# Altium PCB NewTrueTouch.PcbDoc
Units mil, origin at the board's own origin, x right, y up, seen from the top; angles counter-clockwise.
Board outline 3600 x 3500 mil, 2 copper layers (Top Layer, Bottom Layer); 47 components, 37 nets, 184 pads, 3 vias.
Unrouted connection lines stored in the file: 23.
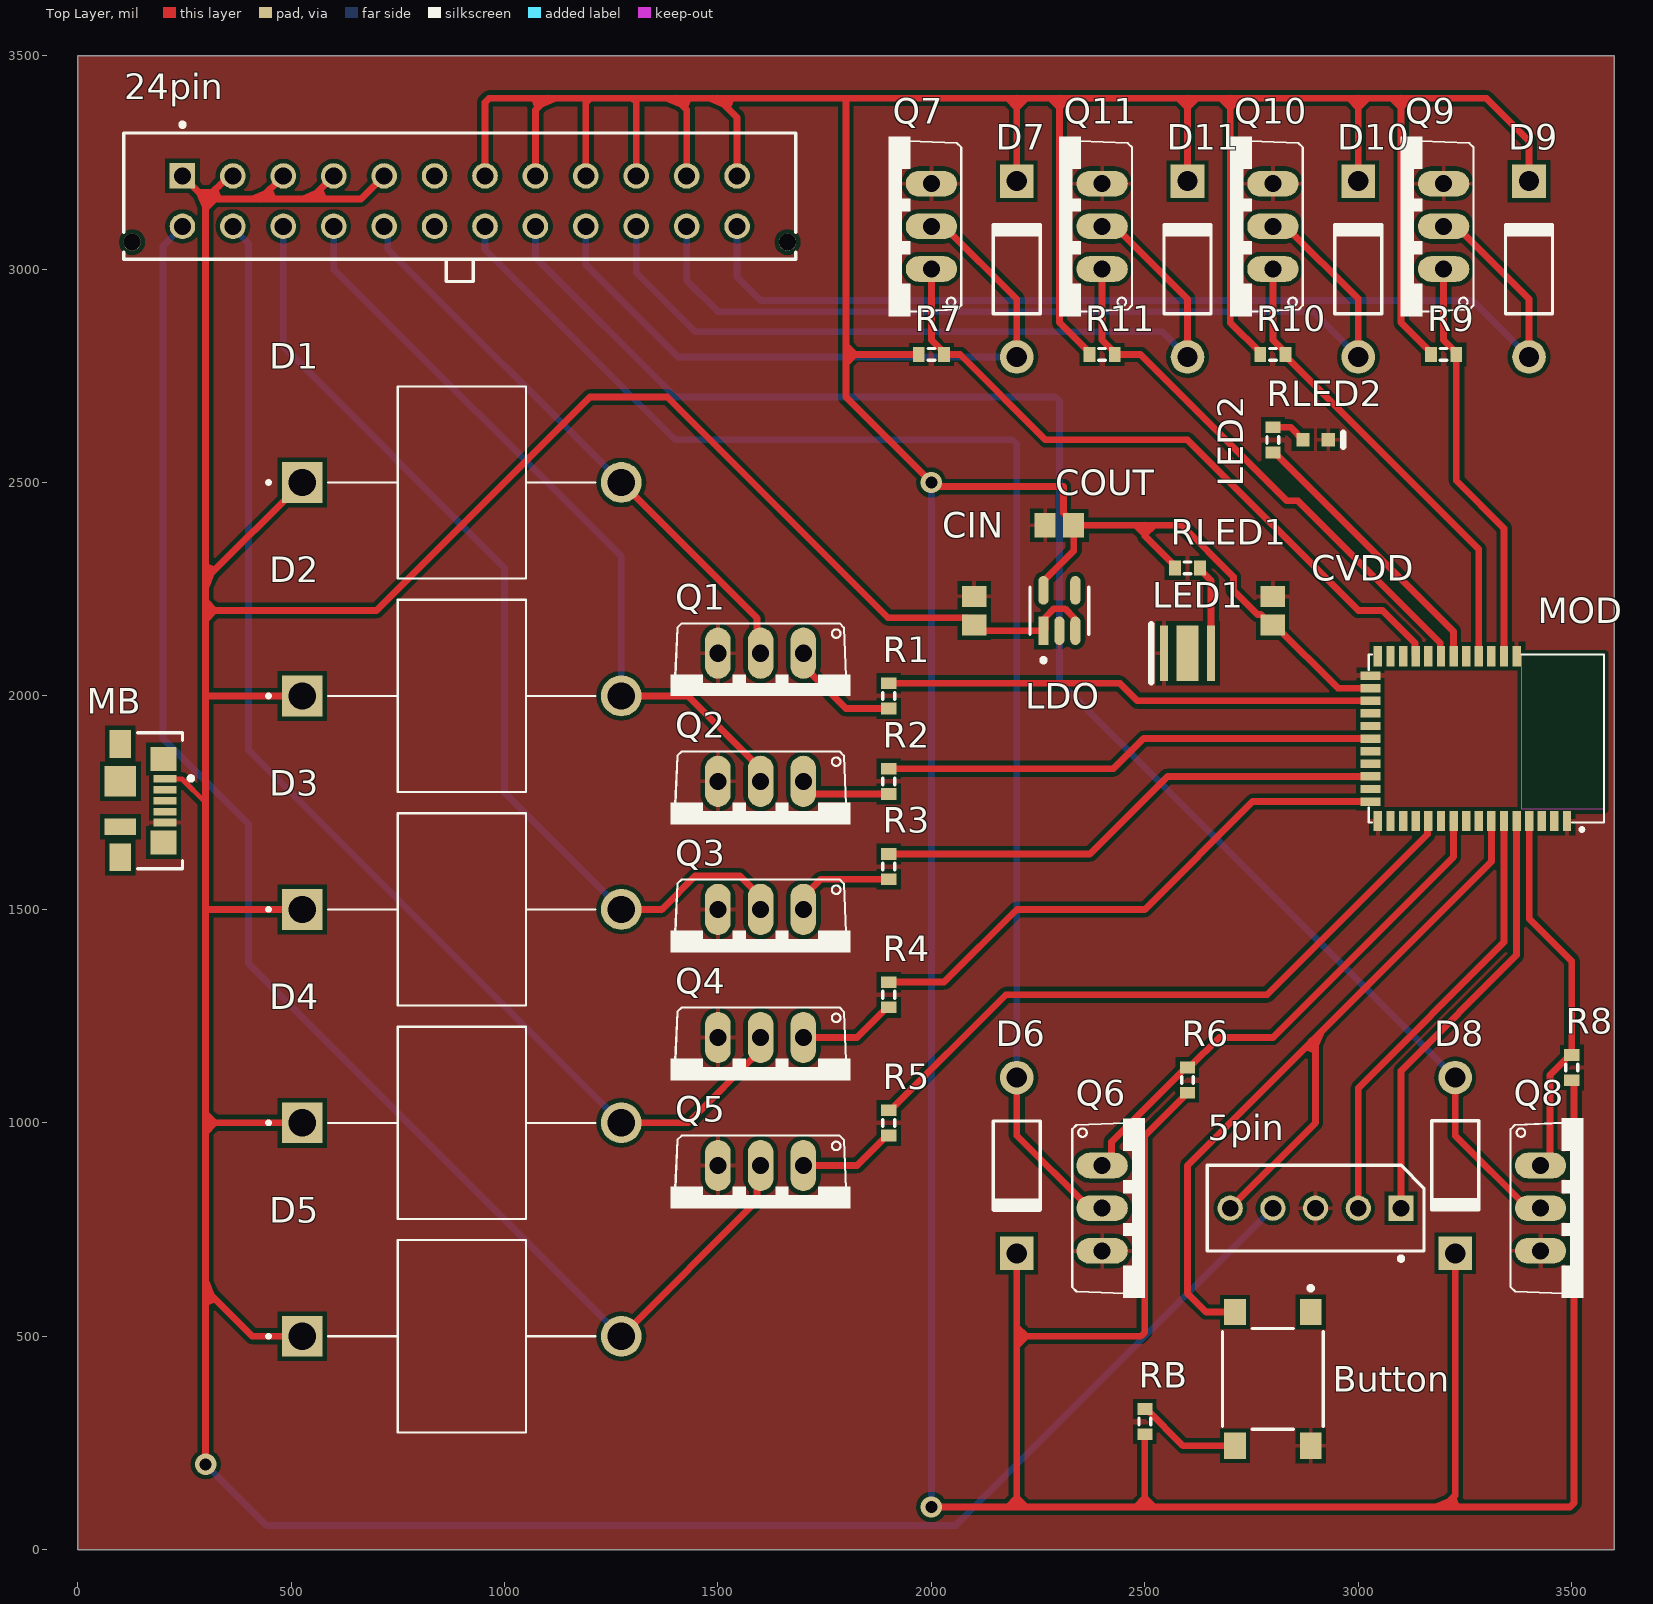
[diagram p0: Top Layer view]
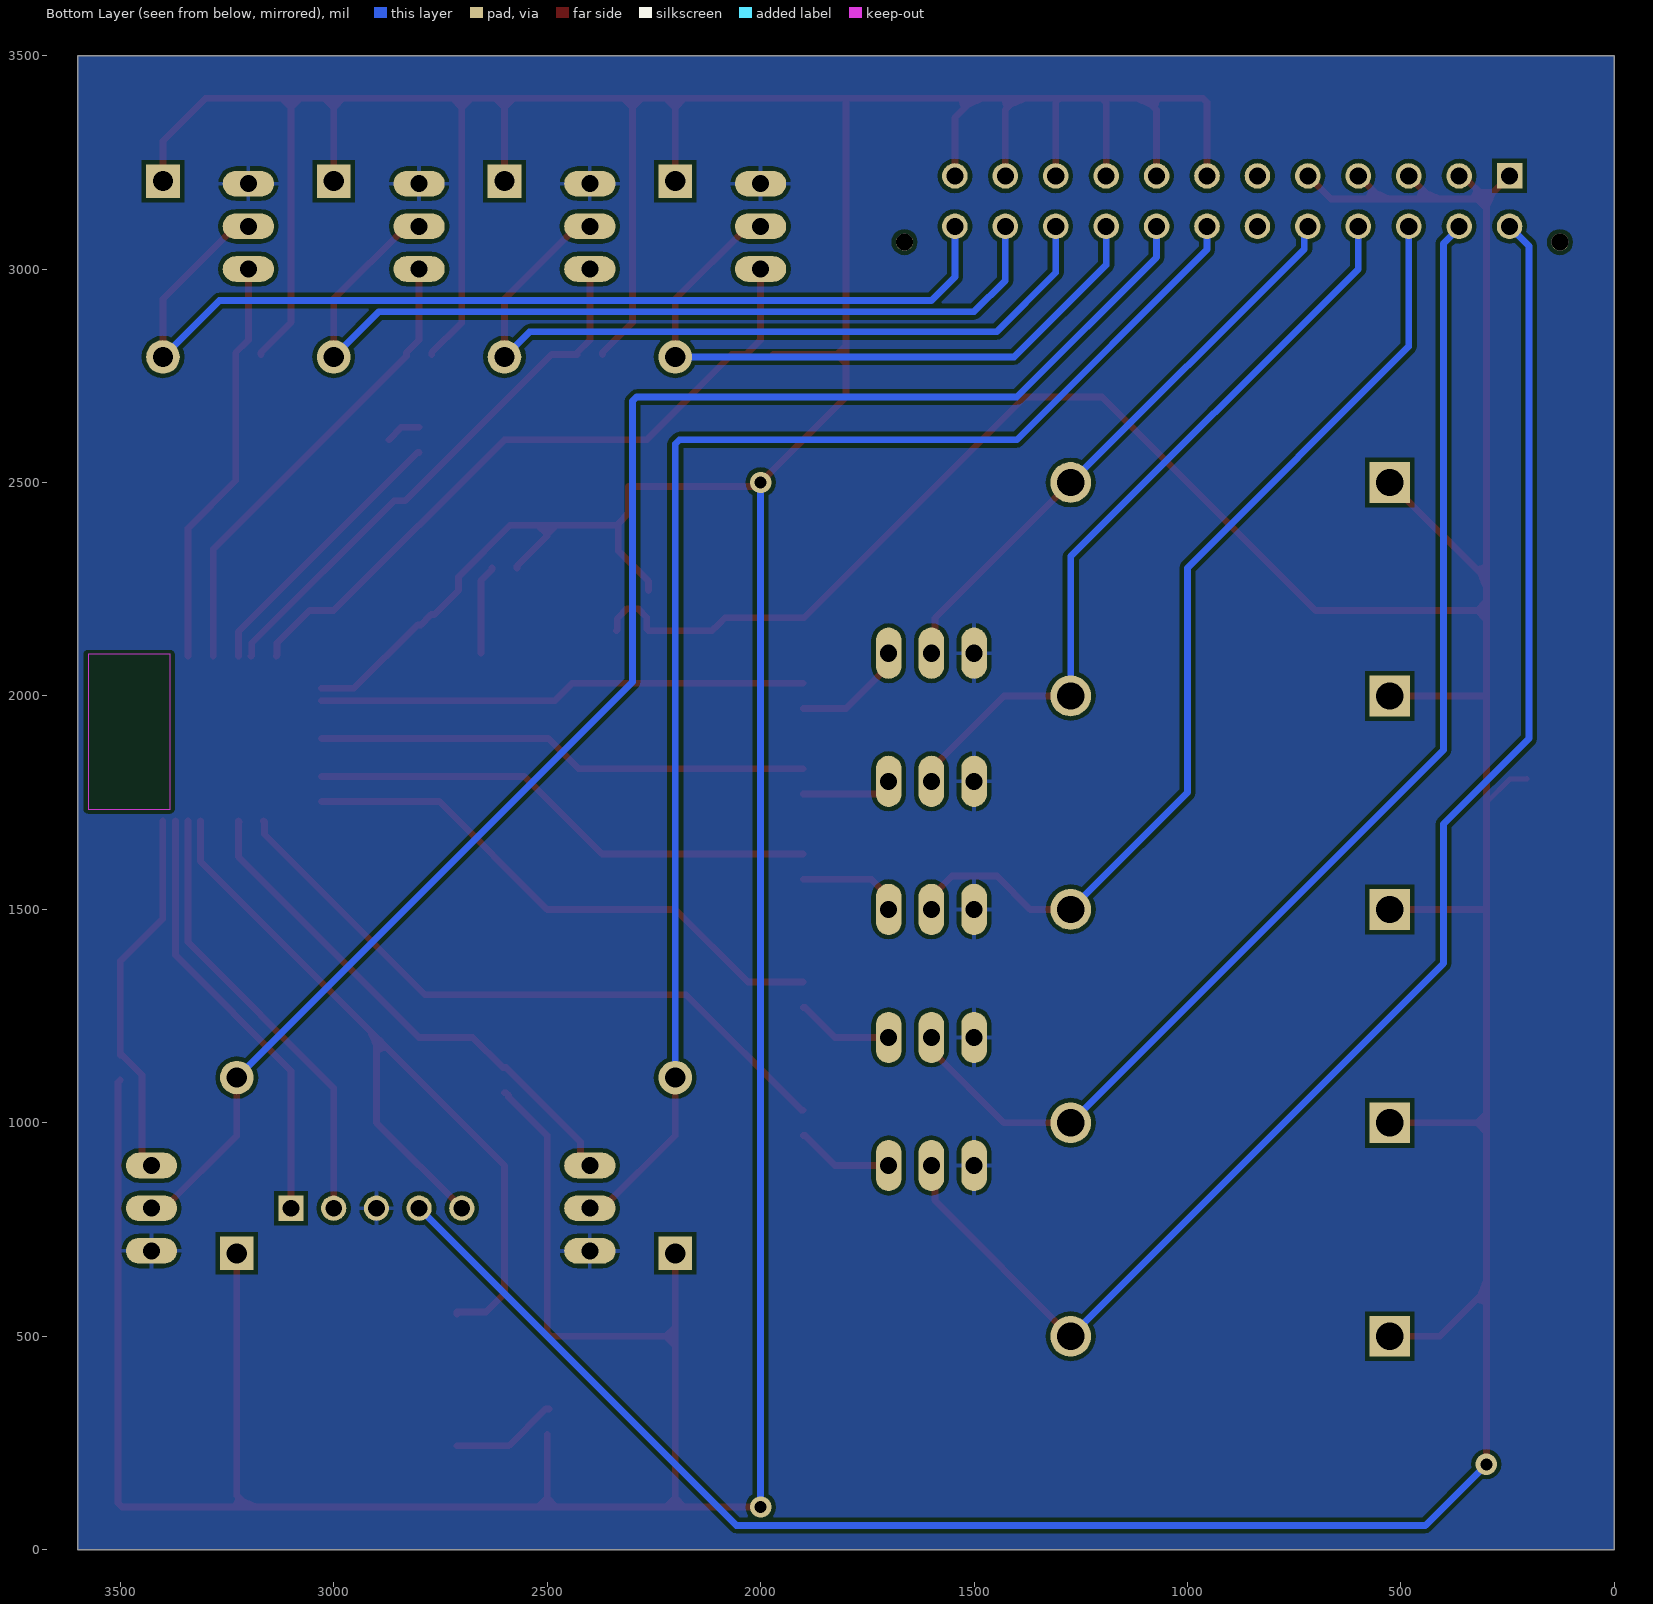
[diagram p1: Bottom Layer view, seen from below]

## Layer stack, top to bottom
Top Solder: solder mask 0.4, Solder Resist, Dk 3.5
Top Layer: signal copper 1.4
Dielectric 1: dielectric 12.6, FR-4, Dk 4.8
Bottom Layer: signal copper 1.4
Bottom Solder: solder mask 0.4, Solder Resist, Dk 3.5

## Board outline
0,0 3600,0 3600,3500 0,3500

## Design rules (kind name [scope] priority, off if disabled: settings)
Clearance [All] p1: gap=10 ignorepadtopadclearanceinfootprint=FALSE except(0: Arc-Hole Track-Hole SMDPad-Hole THPad-Hole Via-Hole Fill-Hole Poly-Hole Region-Hole Text-Hole)
HoleToHoleClearance [All] p1: gap=19.68 allowstackedmicrovias=TRUE
MinimumAnnularRing [All] p1: minimumring=5.12
PolygonConnect [All] p1: connectstyle=Relief reliefconductorwidth=10 reliefentries=4 polygonreliefangle="90 Angle" airgapwidth=10
RoutingVias [All] p1: holewidth=28 width=50 viastyle="Through Hole" minholewidth=28 minwidth=50 maxholewidth=28 maxwidth=50
SolderMaskExpansion [All] p1: expansion=4 istentingtop=FALSE
Width [All] p1: maxlimit=16 minlimit=8 preferedwidth=12 minimp=50.000000 maximp=50.000000 favimp=50.000000
29 further rules are at their usual default settings.

## Components (designator, comment, footprint, x,y, rotation, side; value= is the part's Value field where it differs from the comment)
5pin "66100511622" 66100511622 2900,800 r0 top
24pin "66202421122" 66202421122 895.28,3170.87 r180 top
Button "PTS645SM43SMTR92LFS" FP-PTS645SM43SMTR92LFS-MFG 2800,400 r270 top
CIN "1uF" CAPC2013X140X45NL15T25 2100,2200 r270 top
COUT "1uF" CAPC2013X140X45NL15T25 2300,2400 r0 top
CVDD "1uF" CAPC2013X140X45NL15T25 2800,2200 r270 top
D1 "1N5824" DIOAD1898W129L762D1143 900,2500 r0 top
D2 "1N5824" DIOAD1898W129L762D1143 900,2000 r0 top
D3 "1N5824" DIOAD1898W129L762D1143 900,1500 r0 top
D4 "1N5824" DIOAD1898W129L762D1143 900,1000 r0 top
D5 "1N5824" DIOAD1898W129L762D1143 900,500 r0 top
D6 "Diode 1N4004" DO-41 2200,900 r270 top
D7 "Diode 1N4004" DO-41 2200,3000 r90 top
D8 "Diode 1N4004" DO-41 3226.97,900.11 r270 top
D9 "Diode 1N4004" DO-41 3400,3000 r90 top
D10 "Diode 1N4004" DO-41 3000,3000 r90 top
D11 "Diode 1N4004" DO-41 2600,3000 r90 top
LDO "AP2112K-3.3TRG1" FP-SOT25-IPC_A 2300,2200 r90 top
LED1 "Power LED" CREE-XPEBRD-L1_V 2600,2100 r180 top
LED2 "White LED" LTST-LTW-C191TS5_V 2900,2600 r0 top
MB "473460001" FP-473460001-MFG 113.78,1754.72 r270 top
MOD "BL652-SC-01-T/R" XCVR_BL652-SC-01-T/R 3300,1900 r270 top
Q1 "FQP30N06L" TO220V 1600,2000 r180 top
Q2 "FQP30N06L" TO220V 1600,1700 r180 top
Q3 "FQP30N06L" TO220V 1600,1400 r180 top
Q4 "FQP30N06L" TO220V 1600,1100 r180 top
Q5 "FQP30N06L" TO220V 1600,800 r180 top
Q6 "FQP30N06L" TO220V 2500,800 r270 top
Q7 "FQP30N06L" TO220V 1900,3100 r90 top
Q8 "FQP30N06L" TO220V 3526.97,800.11 r270 top
Q9 "FQP30N06L" TO220V 3100,3100 r90 top
Q10 "FQP30N06L" TO220V 2700,3100 r90 top
Q11 "FQP30N06L" TO220V 2300,3100 r90 top
R1 "Res3" J1-0603 1900,2000 r90 top value=1K
R2 "Res3" J1-0603 1900,1800 r90 top value=1K
R3 "Res3" J1-0603 1900,1600 r90 top value=1K
R4 "Res3" J1-0603 1900,1300 r90 top value=1K
R5 "Res3" J1-0603 1900,1000 r90 top value=1K
R6 "Res3" J1-0603 2600,1100 r270 top value=1K
R7 "Res3" J1-0603 2000,2800 r180 top value=1K
R8 "Res3" J1-0603 3500,1129.53 r270 top value=1K
R9 "Res3" J1-0603 3200,2800 r180 top value=1K
R10 "Res3" J1-0603 2800,2800 r180 top value=1K
R11 "Res3" J1-0603 2400,2800 r180 top value=1K
RB "Res3" J1-0603 2500,300 r270 top value=1K
RLED1 "Res3" J1-0603 2600,2300 r0 top value=4
RLED2 "Res3" J1-0603 2800,2600 r270 top value=8

## Footprints (in the part's own frame and the unit in brackets; to place one, negate y for a bottom-side part, rotate by r counter-clockwise, add the part's x,y. Pads: shape width x height; smd on the part's side, far side on the other; paste and mask are expansions set on the pad)
66100511622 [mm] "2.54 mm Intercom Male Horizontal Shrouded Header, 5p"
  rect 1.5x1.5 hole 1: 1(5.08,0)
  round 1.5 hole 1: 2(2.54,0) 3(0,0) 4(-2.54,0) 5(-5.08,0)
  silkscreen extent -6.45,-3.12 6.45,2.55, body extent -6.2,-2.5 6.2,2.5, height 11.33
66202421122 [mm] "Dual row Vertical header 26p"
  rect 1.52x1.52 hole 1.02: 1(16.5,-1.2)
  round 1.52 hole 1.02: 2(13.5,-1.2) 3(10.5,-1.2) 4(7.5,-1.2) 5(4.5,-1.2) 6(1.5,-1.2) 7(-1.5,-1.2) 8(-4.5,-1.2) 9(-7.5,-1.2) 10(-10.5,-1.2) 11(-13.5,-1.2) 12(-16.5,-1.2) 13(16.5,1.8) 14(13.5,1.8) 15(10.5,1.8) 16(7.5,1.8) 17(4.5,1.8) 18(1.5,1.8) 19(-1.5,1.8) 20(-4.5,1.8) 21(-7.5,1.8) 22(-10.5,1.8) 23(-13.5,1.8) 24(-16.5,1.8)
  round 1.02 hole 1.02 unplated: MH1(-19.5,2.74) MH2(19.5,2.74)
  silkscreen extent -20,-4.37 20,5.08, body extent -19.85,-3.68 19.85,5.08, height 9.93
CAPC2013X140X45NL15T25 [mm] "Chip Capacitor, 2-Leads, Body 2.00x1.25mm, IPC Medium Density"
  rect 1.25x1.45 smd: 1(-0.85,0) 2(0.85,0)
  body extent -1.08,-0.7 1.07,0.7, height 1.4
CREE-XPEBRD-L1_V [mm] "SMD, 3-Leads, Body 3.45x3.45mm"
  rect 0.5x3.3 smd: 1(-1.4,0) 2(1.4,0)
  rect 1.3x3.3 smd paste-1: 3(0,0)
  silkscreen extent 2.15,-1.73 2.15,1.73, body extent -1.72,-1.73 1.73,1.73, height 2.39
DIOAD1898W129L762D1143 [mm]
  round 2.43 hole 1.62: A(9.49,0)
  rect 2.43x2.43 hole 1.62: C(-9.49,0)
  silkscreen extent -11.6,-5.72 7.96,5.72
DO-41 [mm] "Diode, Axial; Body 5.2 x 2.7 mm (LxDia. max), Lead Dia. 0.86 mm (max)"
  round 2 hole 1.2: 1(-5.23,0)
  rect 2x2 hole 1.2: 2(5.23,0)
  silkscreen extent -2.65,-1.4 2.75,1.4
FP-473460001-MFG [mm]
  rect 0.45x1.38 smd paste+0 mask+0: 1(-1.3,2.31) 2(-0.65,2.31) 3(0,2.31) 4(0.65,2.31) 5(1.3,2.31)
  rect 1.425x1.55 smd paste+0 mask+0: 6(-2.488,2.225) 7(2.487,2.225)
  rect 1.65x1.3 smd paste+0 mask+0: 8(-3.375,-0.35) 11(3.375,-0.35)
  rect 1.8x1.9 smd paste+0 mask+0: 9(-1.15,-0.35)
  rect 1x1.9 smd paste+0 mask+0: 10(1.55,-0.35)
  silkscreen extent -4.05,0.68 4.05,3.98, body extent -4.3,-2.48 4.3,3.45, height 0.25
FP-PTS645SM43SMTR92LFS-MFG [mm]
  rect 1.55x1.3 smd paste+0 mask+0: 1(-3.975,2.25) 2(3.975,2.25) 3(-3.975,-2.25) 4(3.975,-2.25)
  silkscreen extent -5.52,-3 3,3, body extent -4.85,-3.1 4.85,3.1, height 0.25
FP-SOT25-IPC_A [mm]
  rect 1.707x0.616 smd paste+0 mask+0: 1(-1.201,0.95)
  rrect100% 1.707x0.616 smd paste+0 mask+0: 2(-1.201,0) 3(-1.201,-0.95) 4(1.201,-0.95) 5(1.201,0.95)
  silkscreen extent -3.08,-1.75 1.4,1.75, body extent -2.55,-2 2.55,2, height 0.25
J1-0603 [mm] "Chip Resistor, Body 1.6x0.8mm, IPC High Density"
  rect 0.7x0.9 smd: 1(-0.75,0) 2(0.75,0)
  silkscreen extent -0.2,-0.35 0.2,0.35, body extent -0.85,-0.48 0.85,0.48, height 0.9
LTST-LTW-C191TS5_V [mm] "SMD, 2-Leads, Body 1.6x0.8mm"
  rect 0.8x0.8 smd: 1(-0.75,0) 2(0.75,0)
  silkscreen extent 1.65,-0.4 1.65,0.4, body extent -0.8,-0.4 0.8,0.4, height 0.65
TO220V [mil]
  oval 60x120 hole 40: 1(-100,-100) 2(0,-100) 3(100,-100)
  silkscreen extent -210,-170 210,0
XCVR_BL652-SC-01-T/R [mm]
  rect 1.2x0.5 smd: 1(4.9,4.8) 2(4.9,4.05) 3(4.9,3.3) 4(4.9,2.55) 5(4.9,1.8) 6(4.9,1.05) 7(4.9,0.3) 8(4.9,-0.45) 9(4.9,-1.2) 10(4.9,-1.95) 11(4.9,-2.7) 12(4.9,-3.45) 13(4.9,-4.2) 14(4.9,-4.95) 15(4.9,-5.7) 16(4.9,-6.45) 28(-4.9,-6.45) 29(-4.9,-5.7) 30(-4.9,-4.95) 31(-4.9,-4.2) 32(-4.9,-3.45) 33(-4.9,-2.7) 34(-4.9,-1.95) 35(-4.9,-1.2) 36(-4.9,-0.45) 37(-4.9,0.3) 38(-4.9,1.05) 39(-4.9,1.8)
  rect 0.5x1.2 smd: 17(3.75,-6.9) 18(3,-6.9) 19(2.25,-6.9) 20(1.5,-6.9) 21(0.75,-6.9) 22(0,-6.9) 23(-0.75,-6.9) 24(-1.5,-6.9) 25(-2.25,-6.9) 26(-3,-6.9) 27(-3.75,-6.9)
  Keep-Out Layer region: 4.2,2.105 -5.012,2.105 -5.012,7 4.2,7
  Keep-Out Layer region: 4.2,2.107 -5.016,2.107 -5.016,7 4.2,7
  Keep-Out Layer region: 4.2,2.105 -5.012,2.105 -5.012,7 4.2,7
  silkscreen extent -5,-7 5.51,7

## Part data
5pin: library part CMP-1502-00609-1, "Intercom Male Shrouded Locking Header WR-WTB, THT, Vertical, pitch 2.54 mm, 1 x 5 position", Contact Resistance=20mOhm, Manufacturer="Wurth Elektronik", Operating Temperature=-40to125degC, Working Voltage=50VAC, Datasheet URL=https://katalog.we-online.de/em/datasheet/6610xx11622.pdf, Gender=Male, Manufacturer URL=http://www.we-online.de, Mounting Technology=THT, Orientation=Vertical, Package Reference=66100511622, Packaging=Box, Part Number=66100511622, Pitch=2.54mm, Position=1x5, Publisher=WurthElektronik
24pin: library part CMP-1502-00319-1, "THT Male Header WR-MPC3, Vertical, Dual Row, pitch 3 mm, 24 pins", Contact Resistance=10mOhm, Manufacturer="Wurth Elektronik", Operating Temperature=-40to105degC, Working Voltage=250VAC, Datasheet URL=https://katalog.we-online.de/em/datasheet/6620xx21122.pdf, Gender=Male, Manufacturer URL=http://www.we-online.de, Mounting Technology=THT, Orientation=Vertical, Package Reference=66202421122, Packaging=Tube, Part Number=66202421122, Pin Number=24, Pitch=3mm, Publisher=WurthElektronik
Button: library part CMP-2000-05160-2, "SWITCH TACTILE SPST-NO 0.05A 12V", Case/Package=SMD/SMT, Color=Black, Contact Resistance=100mR, Current Rating=50mA, Max Operating Temperature=60°C, Max Voltage Rating (DC)=12V, Min Operating Temperature=-20°C, Operating Force=160gf, Package Quantity=1, Actuator Length=0.85mm, Actuator Material=Nylon, Actuator Type=Standard, Contact Material=Silver, Contact Plating=Silver, Depth=9mm, Illumination Type=Non-Illuminated, Lead Free="Lead Free", Length=6mm, Max Current Rating=50mA, Mechanical Life=100000Cycles, Mount="Surface Mount", Orientation=Straight, Packaging="Tape and Reel", REACH SVHC="No SVHC", Switch Function=Off-Mom, Termination="Gull Wing", Throw Configuration=SPST, Voltage Rating (DC)=12V
CIN COUT CVDD: library part CMP-2007-03403-1, Manufacturer=Murata, Part Number=GRM21BR71E105KA99L
D1 D2 D3 D4 D5: "Diode Schottky 30V 5A Through Hole Axial", Package="Axial Microsemi", Availability=Unavailable, MF="Microsemi Corporation", MP=1N5824, Price=None, SnapEDA_Link=https://www.snapeda.com/parts/1N5824/Microsemi%20Corporation/view-part/49055/?ref=snap
D6 D7 D8 D9 D10 D11: "1 Amp General Purpose Rectifier", Code_JEDEC=DO-204-AL, ComponentLink1Description="Manufacturer Link", ComponentLink1URL=http://www.fairchildsemi.com/, ComponentLink2Description=Datasheet, ComponentLink2URL=http://www.fairchildsemi.com/ds/1N%2F1N4001.pdf, DatasheetVersion=1998, LatestRevisionDate=17-Jul-2002, LatestRevisionNote="Re-released for DXP Platform.", PackageDescription="Diode, Axial; Body 5.2 x 2.7 mm (LxDia. max), Lead Dia. 0.86 mm (max)", PackageReference=DO-41, PackageVersion=Aug-1999, Published=8-Jun-2000, Publisher="Altium Limited"
LDO: library part CMP-12756-000035-1, "IC REG LINEAR 3.3V 600MA SOT25", Case/Package=SOT-23-5, Dropout Voltage=250mV, Max Input Voltage=6V, Max Operating Temperature=85°C, Max Output Current=600mA, Min Input Voltage=2.5V, Min Operating Temperature=-40°C, Output Voltage=3.3V, Package Quantity=1, Quiescent Current=55uA, Accuracy=1.5%, Height=1.3mm, Lead Free="Lead Free", Length=3.1mm, Mount="Surface Mount", Number of Outputs=1, Number of Pins=5, Number of Regulators=1, Output Current=600mA, Output Type=Fixed, Packaging="Tape and Reel", Polarity=Positive, Width=1.7mm
LED1: library part CMP-2000-07424-1, "Cree(R) XLamp(R) XP-E2 LED, Red, Dominant Wavelength 620 to 630 nm, Minimum Luminous Flux 73.9 lm, 2-Pin SMD, RoHS, Tape and Reel", Forward Current=350mA, Forward Voltage=2.2V, Illumination Color=Red, Lens Color/Style=Clear, Manufacturer=Cree,Inc., Maximum Operating Temperature=+150C, Package Description="3-Pin Surface Mount Device, Body 3.45 x 3.45 mm", Package Reference=XPEBRD-L1, Power Rating=3W, Brand=Cree,Inc., Datasheet URL=http://www.cree.com/sitecore-modules/web/~/media/Files/Cree/LED-Components-and-Modules/XLamp/Data-and-Binning/XLampXPE2.pdf, Datasheet Version="Rev. 8I, 05/2016", Factory Pack Quantity=1000, Luminous Flux/Radiant Flux=73.9lm, Manufacturer URL=http://www.cree.com/, Mounting Style=SMD/SMT, Mounting Technology=SurfaceMount, Packaging=Reel, Product Category=HighPowerLEDs-SingleColor, RoHS=Details, Series=XlampXP-E2Color, Viewing Angle=130deg, Wavelength=630nm
LED2: library part CMP-1674-00013-1, "LED Uni-Color White, 70 mW, 20 mA, -20 to 80 degC, 2-Pin SMD, RoHS, Tape and Reel", Case Code (Imperial)=0603, Case Code (Metric)=1608, Max Operating Temperature="155 degC", Min Operating Temperature="-55 degC", Package Quantity=5000, Power Rating="100 mW", Resistance="12 Ohm", Tolerance=1%, Voltage Rating="50 V", Case\Package=0603, ComponentLink1Description="Manufacturer URL", ComponentLink1URL=http://www.us.liteon.com/, ComponentLink2Description=Datasheet, ComponentLink2URL=http://optoelectronics.liteon.com/upload/download/DS22-2004-201/S_110_LTW-C191TS5.pdf, DatasheetVersion="Rev. B, 06/2010", Height="0.45 mm", Length="1.6 mm", Mount="Surface Mount", PackageDescription="2-Pin Surface Mount Device, Body 1.6 x 0.8 mm", PackageReference=LTW-C191TS5, Packaging="Tape and Reel", Pins=2, REACH SVHC="No SVHC", RoHSCompliant=true, Voltage Rating (DC)="50 V", Width="0.8 mm"
MB: library part CMP-2000-05246-2, "CONN RCPT USB2.0 MICRO B SMD R/A", Current Rating=1.8A, Manufacturer=Molex, Package=0, Temperature="-30°C to +85°C", Temperature Range High=+85°C, Temperature Range Low=-30°C, Voltage Rating=30V, Automotive=No, Category=Conn, ComponentLink2Description=Datasheet, ComponentLink2URL=https://www.molex.com/webdocs/datasheets/pdf/en-us/0473460001_IO_CONNECTORS.pdf, Conn Orientation="Right Angle", Contact Material=Gold,Nickel, Device Class L1=Connectors, Device Class L2="USB Connectors", Device Class L3=unset, Digikey Description="CONN RCPT USB2.0 MICRO B SMD R/A", Footprint Url=https://www.molex.com/pdm_docs/sd/473460001_sd.pdf, Height=2.945mm, Is Female=yes, Lead Free=Yes, Manufacturer Part Number=473460001, Number Of Contacts=5, Octopart=https://octopart.com/47346-0001-molex-7164928, Pitch=0.65mm, RoHS=TRUE, Shielding=true, Usb Standard="USB 2.0"
MOD: "Bluetooth Bluetooth v5.0 Transceiver Module 2.4GHz Antenna Not Included, I-PEX MHF4 Surface Mount", Package="SMD-39 Laird", Digi-Key_Part_Number=BL652-SC-01-CT-ND, DigiKey-Purchase-URL=https://snapeda.com/shop?store=DigiKey&id=1215493, MF="Laird -", MP=BL652-SC-01-T/R, SnapEDA_Link=https://www.snapeda.com/parts/BL652-SC-01-T/R/Laird%20-%20Wireless%20&%20Thermal%20Systems/view-part/1215493/?ref=snap
Q1 Q2 Q3 Q4 Q5 Q6 Q7 Q8 Q9 Q10 Q11: "N-Channel 60V 32A _Tc_ 79W _Tc_ Through Hole TO-220-3", Package="TO-220 ON Semiconductor", Availability=Unavailable, MF="ON Semiconductor", MP=FQP30N06L, Price=None, SnapEDA_Link=https://www.snapeda.com/parts/FQP30N06L/ON%20Semiconductor/view-part/1413126/?ref=snap
R1 R2 R3 R4 R5 R6 R7 R8 R9 R10 R11 RB RLED1 RLED2: "Resistor", LatestRevisionDate=29-May-2009, LatestRevisionNote="IPC-7351 Footprint Added.", PackageDescription="Chip Resistor", PackageReference=J1-0603, Published=8-Jun-2000, Publisher="Altium Limited"

## Via types
v1: diameter 50, hole 28, Top Layer to Bottom Layer, 3 vias

## Nets (pads, with @x,y where several pads share a name; then routed paths per layer and width w, separated by ;. In a path a pad name is that pad's centre, name@x,y a point inside that pad or via, vN(x,y) a via of type N, cw(c..) or ccw(c..) an arc to the next point about the centre after c; other vN are vias at no path point)
+3V3: 24pin.7 24pin.8 24pin.9 24pin.10 24pin.11 24pin.12 COUT.2 CVDD.2 D6.2 D7.2 D8.2 D9.2 D10.2 D11.2 LDO.5 MOD.26 R6.2 R7.2 R8.2 R9.2 R10.2 R11.2 RB.2 RLED1.1 | length 16106.4
  Top Layer w16: 24pin.7 954.33,3390.63 963.7,3400 1100,3400 ; 24pin.8 1072.44,3372.44 1100,3400 ; 24pin.9 1190.55,3390.55 1200,3400 ; 24pin.10 1308.66,3391.34 1300,3400 ; 24pin.11 1426.77,3373.23 1400,3400 ; 24pin.12 1544.88,3355.12 1500,3400 ; 1800,3390.63 1800,2800 ; R7.2 1800,2800 ; v1(2000,100) 2200,100 ; D6.2 2200,500 ; D7.2 2200,3400 ; LDO.5 2262.6,2268.75 2333.46,2339.61 COUT.2 ; R11.2 2370.47,2803.94 2300,2874.41 2300,3400 ; RB.2 2500,100 ; RLED1.1 2570.47,2303.94 2500,2374.41 2500,2400 ; R6.2 2596.06,1070.47 2590.28,1064.69 2590.28,1060.76 2500,970.47 2500,509.37 2490.63,500 2200,500 ; D11.2 2600,3400 ; R10.2 2770.47,2803.94 2700,2874.41 2700,3400 ; D10.2 3000,3400 ; MOD.26 2952.36,2018.11 2803.94,2166.54 CVDD.2 2796.06,2166.54 2771.74,2190.86 2764,2190.86 2707.38,2247.48 2707.38,2279.1 2586.48,2400 2500,2400 ; R9.2 3170.47,2803.94 3100,2874.41 3100,3400 ; D8.2 3226.97,126.97 3200,100 ; D9.2 3400,3300 3300,3400 3100,3400 ; R8.2 3504.97,1095.03 3504.97,109.37 3495.6,100 3200,100 ; 1100,3400 1200,3400 ; 1200,3400 1300,3400 ; 1300,3400 1400,3400 ; 1400,3400 1500,3400 ; 1500,3400 2200,3400 ; 1800,2800 1800,2700 v1(2000,2500) 2009.14,2490.86 2309.14,2490.86 2309.14,2428.26 2333.46,2403.94 COUT.2 ; 2200,100 2200,500 ; 2200,100 2500,100 ; 2200,3400 2300,3400 ; 2300,3400 2600,3400 ; COUT.2 2500,2400 ; 2500,100 3200,100 ; 2600,3400 2700,3400 ; 2700,3400 3000,3400 ; 3000,3400 3100,3400
  Bottom Layer w16: v1(2000,100) v1(2000,2500)
+5: 5pin.4 24pin.1 24pin.2 24pin.3 24pin.4 24pin.5 CIN.2 D1.C D2.C D3.C D4.C D5.C LDO.1 LDO.3 MB.1 | length 10522.8
  Top Layer w12: MB.1 205.46,1805.17 244.83,1805.17 300,1750
  Top Layer w16: 24pin.1 300,3163.78 ; v1(300,200) 300,609.37 ; 24pin.2 354.33,3218.11 300,3163.78 ; 24pin.3 427.56,3163.78 ; D5.C 409.37,500 300,609.37 ; D4.C 300,1000 ; D3.C 300,1500 ; D2.C 300,2000 ; D1.C 300,2273.62 ; 24pin.4 545.67,3163.78 ; 24pin.5 663.78,3163.78 545.67,3163.78 ; LDO.3 2335.82,2154.31 2335.82,2180.99 2312.48,2204.34 2287.52,2204.34 2266.72,2183.54 2266.72,2156.86 LDO.1 2113.8,2152.73 CIN.2 2083.39,2183.14 1898.16,2183.14 1381.3,2700 1200,2700 700,2200 300,2200 ; 300,609.37 300,1000 ; 300,1000 300,1500 ; 300,1500 300,1750 300,2000 ; 300,2000 300,2200 ; 300,2200 300,2273.62 ; 300,2273.62 300,3163.78 ; 300,3163.78 427.56,3163.78 ; 427.56,3163.78 545.67,3163.78
  Bottom Layer w16: v1(300,200) 443,57 2057,57 5pin.4
GND: 5pin.3 Button.2 CIN.1 COUT.1 CVDD.1 LDO.2 LED1.2 LED2.2 MB.5 MOD.1 MOD.16 MOD.27 MOD.39 Q1.3 Q2.3 Q3.3 Q4.3 Q5.3 Q6.3 Q7.3 Q8.3 Q9.3 Q10.3 Q11.3
M1: 24pin.19 D6.1 Q6.2 | length 3379.5
  Top Layer w16: D6.1 2200,970 2370,800 Q6.2
  Bottom Layer w16: 24pin.19 954.33,3045.67 1400,2600 2190.63,2600 2200,2590.63 D6.1
M2: 24pin.21 D7.1 Q7.2 | length 1595.5
  Top Layer w16: Q7.2 2030,3100 2200,2930 D7.1
  Bottom Layer w16: 24pin.21 1190.55,3009.45 1405.91,2794.09 D7.1
M3: 24pin.20 D8.1 Q8.2 | length 3814.5
  Top Layer w16: D8.1 3226.97,970.11 3396.97,800.11 Q8.2
  Bottom Layer w16: 24pin.20 1072.44,3027.56 1400,2700 2290.63,2700 2300,2690.63 2300,2032.99 D8.1
M4: 24pin.24 D9.1 Q9.2 | length 2457.8
  Top Layer w16: Q9.2 3230,3100 3400,2930 D9.1
  Bottom Layer w16: 24pin.24 1544.88,2981.12 1600,2926 3268.09,2926 D9.1
M5: 24pin.23 D10.1 Q10.2 | length 2180.5
  Top Layer w16: Q10.2 2830,3100 3000,2930 D10.1
  Bottom Layer w16: 24pin.23 1426.77,2973.23 1500,2900 2894.09,2900 D10.1
M6: 24pin.22 D11.1 Q11.2 | length 1888
  Top Layer w16: Q11.2 2430,3100 2600,2930 D11.1
  Bottom Layer w16: 24pin.22 1308.66,2991.34 1446.95,2853.05 2541.04,2853.05 D11.1
NetButton_4: Button.4 RB.1 | length 251
  Top Layer w16: RB.1@2496.06,329.53 RB.1 2503.94,329.53 2589.96,243.5 Button.4
NetLED1_1: LED1.1 RLED1.2 | length 210.6
  Top Layer w16: RLED1.2 2629.53,2296.06 2655.12,2270.47 LED1.1
NetLED2_1: LED2.1 RLED2.1 | length 82.7
  Top Layer w16: RLED2.1 2840.94,2629.53 LED2.1
NetMOD_4: MOD.4 Q8.1 R8.1 | length 881.8
  Top Layer w16: MOD.4 3400.39,1478.8 3500,1379.19 R8.1 3496.06,1159.06 3448.97,1111.96 3448.97,920.44 3428.65,900.11 Q8.1
NetMOD_10: MOD.10 Q6.1 R6.1 | length 1228.6
  Top Layer w16: Q6.1 2401.67,900 2422,920.33 2422,955.46 2596.06,1129.53 R6.1 2603.94,1129.53 2674.41,1200 2800,1200 3223.23,1623.23 3223.23,1703.72 3221.54,1705.4 MOD.10
NetMOD_12: MOD.12 R5.2 | length 1562
  Top Layer w16: R5.2 1903.94,1029.53 2174.41,1300 2786.48,1300 3162.49,1676.01 3162.49,1705.4 MOD.12
NetMOD_17: MOD.17 R4.2 | length 1303.5
  Top Layer w16: R4.2 2029.53,1329.53 2200,1500 2500,1500 2752.36,1752.36 MOD.17
NetMOD_19: MOD.19 R3.2 | length 1203.7
  Top Layer w16: R3.2 2371.12,1629.53 2553.01,1811.42 MOD.19
NetMOD_22: MOD.22 R2.2 | length 1157.5
  Top Layer w16: R2.2 2426.83,1829.53 2497.3,1900 MOD.22
NetMOD_25: MOD.25 R1.2 | length 1145.3
  Top Layer w16: R1.2 2441.59,2029.53 2482.54,1988.58 MOD.25
NetMOD_31: MOD.31 Q7.1 R7.1 | length 1627.5
  Top Layer w16: Q7.1 2000,2833.46 2029.53,2803.94 R7.1 2067.65,2800 2267.65,2600 2600,2600 3000,2200 3056.95,2200 3132.96,2123.99 3132.96,2094.6 MOD.31
NetMOD_33: MOD.33 Q11.1 R11.1 | length 1286.5
  Top Layer w16: Q11.1 2400,2833.46 2429.53,2803.94 R11.1 2489.9,2800 2832.76,2457.14 2858.87,2457.14 3192.02,2123.99 3192.02,2094.6 MOD.33
NetMOD_34: MOD.34 RLED2.2 | length 655.2
  Top Layer w16: RLED2.2 2803.94,2570.47 3223.23,2151.18 MOD.34
NetMOD_36: MOD.36 Q10.1 R10.1 | length 1106.9
  Top Layer w16: Q10.1 2800,2833.46 2829.53,2803.94 R10.1 2829.53,2796.06 3282.28,2343.31 MOD.36
NetMOD_38: MOD.38 Q9.1 R9.1 | length 965.6
  Top Layer w16: Q9.1 3200,2833.46 3229.53,2803.94 R9.1 3229.53,2504.47 3341.34,2392.66 MOD.38
NetQ1_1: Q1.1 R1.1 | length 271.2
  Top Layer w16: Q1.1 1700,2070 1799.53,1970.47 R1.1
NetQ2_1: Q2.1 R2.1 | length 217.6
  Top Layer w16: Q2.1 1700,1790.8 1720.33,1770.47 R2.1
NetQ3_1: Q3.1 R3.1 | length 246.8
  Top Layer w16: Q3.1 1700,1530 1740.47,1570.47 R3.1
NetQ4_1: Q4.1 R4.1 | length 229.2
  Top Layer w16: Q4.1 1825.59,1200 1896.06,1270.47 R4.1
NetQ5_1: Q5.1 R5.1 | length 229.2
  Top Layer w16: Q5.1 1825.59,900 1896.06,970.47 R5.1
NRESET: 5pin.5 Button.3 MOD.7 | length 2019.1
  Top Layer w16: 5pin.5 2900,1000 2900,1200 ; Button.3@2711.42,551.57 Button.3 2643.5,556.5 2600,600 2600,900 2900,1200 ; MOD.7 3311.81,1611.81 2900,1200
S1: 24pin.17 D1.A Q1.2 | length 1365.3
  Top Layer w16: D1.A 1591.58,2182.04 1591.58,2108.42 Q1.2
  Bottom Layer w16: 24pin.17 726.5,3091.61 726.5,3047.12 D1.A
S2: 24pin.16 D2.A Q2.2 | length 1805.8
  Top Layer w16: D2.A 1430,2000 1600,1830 Q2.2
  Bottom Layer w16: 24pin.16 600,3000 1273.62,2326.38 D2.A
S3: 24pin.15 D3.A Q3.2 | length 2336.5
  Top Layer w16: D3.A 1368.53,1500 1446.53,1578 1552,1578 1600,1530 Q3.2
  Bottom Layer w16: 24pin.15 481.89,2818.11 1000,2300 1000,1773.62 D3.A
S4: 24pin.14 D4.A Q4.2 | length 2903.7
  Top Layer w16: D4.A 1430,1000 1600,1170 Q4.2
  Bottom Layer w16: 24pin.14 363.78,3096.19 400,3059.96 400,1873.62 D4.A
S5: 24pin.13 D5.A Q5.2 | length 3598.8
  Top Layer w16: D5.A 1591.58,817.96 1591.58,891.58 Q5.2
  Bottom Layer w16: 24pin.13 200,3054.33 200,1900 400,1700 400,1373.62 D5.A
SWDCLK: 5pin.2 MOD.6 | length 1048.5
  Top Layer w16: 5pin.2 3000,1081.73 3341.34,1423.07 MOD.6
SWDIO: 5pin.1 MOD.5 | length 1019.3
  Top Layer w16: 5pin.1 3100,1121.91 3370.87,1392.77 MOD.5
pads on no net: 24pin.6 24pin.18 24pin.MH1 24pin.MH2 Button.1 LDO.4 LED1.3 MB.2 MB.3 MB.4 MB.6 MB.7 MB.8 MB.9 MB.10 MB.11 MOD.2 MOD.3 MOD.8 MOD.9 MOD.11 MOD.13 MOD.14 MOD.15 MOD.18 MOD.20 MOD.21 MOD.23 MOD.24 MOD.28 MOD.29 MOD.30 MOD.32 MOD.35 MOD.37

## Polygon pours and split planes (outlines as drawn)
GND on Top Layer "GND_L01_P000" (solid, pour order 0): 0,0 3600,0 3600,3500 0,3500
GND on Bottom Layer "GND_L02_P001" (solid, pour order 1): 0,0 3600,0 3600,3500 0,3500

## Text inside footprints (layer, text, board x,y; h text height)
Q1: Mechanical 13 "1" at 1725.25,2125.25 h50.1 r180; Mechanical 13 "2" at 1625.03,2125.17 h50.07 r180; Mechanical 13 "3" at 1524.94,2125.1 h50.04 r180
Q2: Mechanical 13 "1" at 1725.25,1825.25 h50.1 r180; Mechanical 13 "2" at 1625.03,1825.17 h50.07 r180; Mechanical 13 "3" at 1524.94,1825.1 h50.04 r180
Q3: Mechanical 13 "1" at 1725.25,1525.25 h50.1 r180; Mechanical 13 "2" at 1625.03,1525.17 h50.07 r180; Mechanical 13 "3" at 1524.94,1525.1 h50.04 r180
Q4: Mechanical 13 "1" at 1725.25,1225.25 h50.1 r180; Mechanical 13 "2" at 1625.03,1225.17 h50.07 r180; Mechanical 13 "3" at 1524.94,1225.1 h50.04 r180
Q5: Mechanical 13 "1" at 1725.25,925.25 h50.1 r180; Mechanical 13 "2" at 1625.03,925.17 h50.07 r180; Mechanical 13 "3" at 1524.94,925.1 h50.04 r180
Q6: Mechanical 13 "1" at 2374.75,925.25 h50.1 r270; Mechanical 13 "2" at 2374.83,825.03 h50.07 r270; Mechanical 13 "3" at 2374.9,724.94 h50.04 r270
Q7: Mechanical 13 "1" at 2025.25,2974.75 h50.1 r90; Mechanical 13 "2" at 2025.17,3074.97 h50.07 r90; Mechanical 13 "3" at 2025.1,3175.06 h50.04 r90
Q8: Mechanical 13 "1" at 3401.72,925.36 h50.1 r270; Mechanical 13 "2" at 3401.81,825.14 h50.07 r270; Mechanical 13 "3" at 3401.87,725.05 h50.04 r270
Q9: Mechanical 13 "1" at 3225.25,2974.75 h50.1 r90; Mechanical 13 "2" at 3225.17,3074.97 h50.07 r90; Mechanical 13 "3" at 3225.1,3175.06 h50.04 r90
Q10: Mechanical 13 "1" at 2825.25,2974.75 h50.1 r90; Mechanical 13 "2" at 2825.17,3074.97 h50.07 r90; Mechanical 13 "3" at 2825.1,3175.06 h50.04 r90
Q11: Mechanical 13 "1" at 2425.25,2974.75 h50.1 r90; Mechanical 13 "2" at 2425.17,3074.97 h50.07 r90; Mechanical 13 "3" at 2425.1,3175.06 h50.04 r90